# EAGLE board LTC4222 (EAGLE 9.6.2)
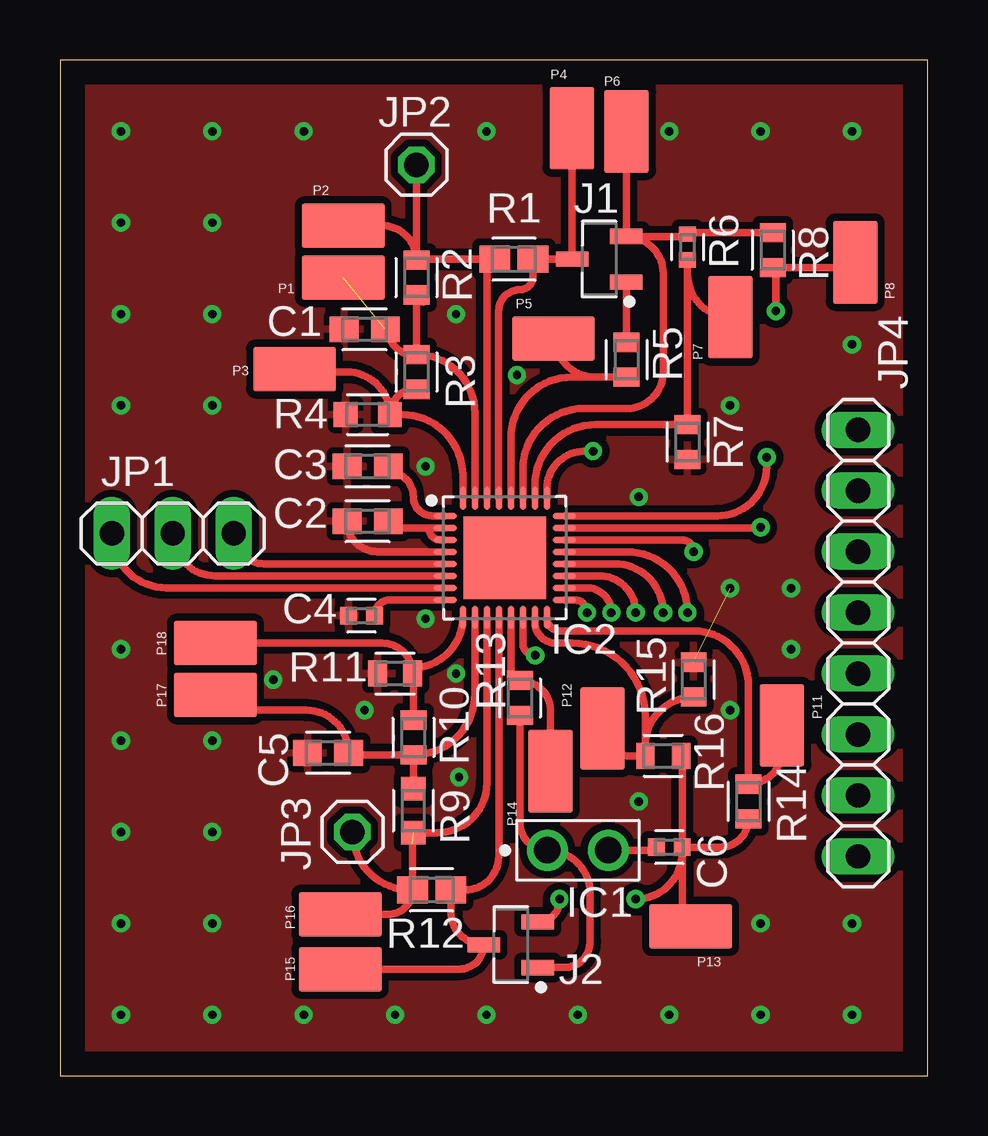
[diagram p0: board, top side]
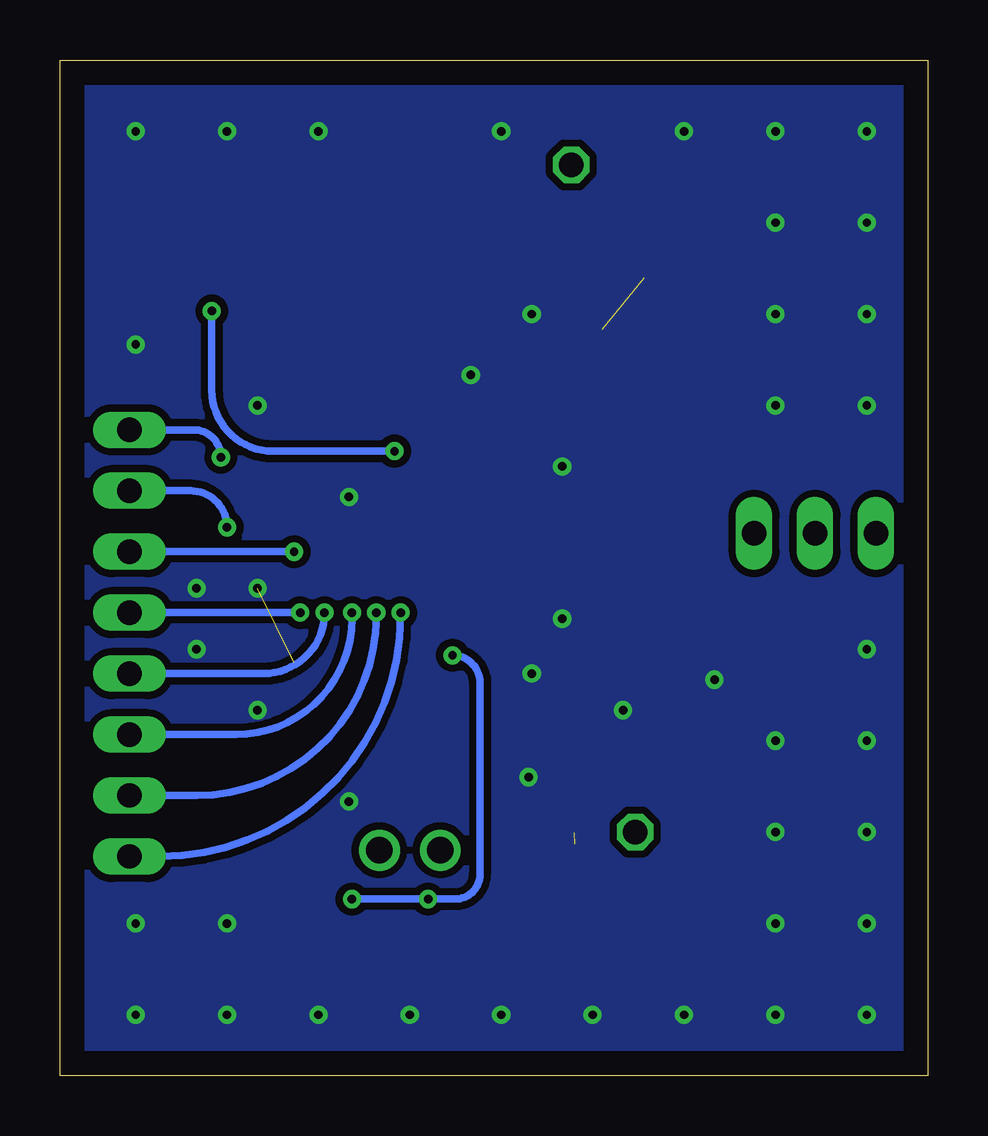
[diagram p1: board, bottom side, seen from below]

Size 36.17 x 42.34 mm. Coordinates in mm from the lower left corner, seen from the top.
Outline: 0,0 36.17,0 36.17,42.34 0,42.34 0,0
Copper layers (1*16): Top 0.035mm / dielectric 1.5mm / Bottom 0.035mm
Design rules "default": minimum track width 6mil, minimum drill 0.35mm, track to track 6mil, track to pad 6mil, pad to pad 6mil, via to via 6mil, smd to smd 6mil, copper to edge 40mil, drill to drill 6mil, minimum pad ring 10mil, minimum via ring 8mil, stop-mask expansion 4mil, vias tented up to drill 0mil, thermal gap 10mil

## Footprints (pad centres in the part's own frame; a part is rotated, then mirrored left to right if it is on the bottom)
CAPC1608X80M = smd 1.2 x 1.074: 1 -0.86,0; 2 0.86,0
CAPC1005X50M = smd 0.699 x 0.737: 1 -0.54,0; 2 0.54,0
HDRV2W64P254_2X1_241X508X838B = drill 1.105 pad 1.705: 1 0,0; 2 0,-2.54
QFN50P500X500X75-33T345M = smd 0.96 x 0.27: 1 -2.485,1.75; 2 -2.485,1.25; 3 -2.485,0.75; 4 -2.485,0.25; 5 -2.485,-0.25; 6 -2.485,-0.75; 7 -2.485,-1.25; 8 -2.485,-1.75; 17 2.485,-1.75; 18 2.485,-1.25; 19 2.485,-0.75; 20 2.485,-0.25; 21 2.485,0.25; 22 2.485,0.75; 23 2.485,1.25; 24 2.485,1.75 | smd 0.27 x 0.96: 9 -1.75,-2.485; 10 -1.25,-2.485; 11 -0.75,-2.485; 12 -0.25,-2.485; 13 0.25,-2.485; 14 0.75,-2.485; 15 1.25,-2.485; 16 1.75,-2.485; 25 1.75,2.485; 26 1.25,2.485; 27 0.75,2.485; 28 0.25,2.485; 29 -0.25,2.485; 30 -0.75,2.485; 31 -1.25,2.485; 32 -1.75,2.485 | smd 3.45 x 3.45: 33 0,0
SOT95P230X110-3M = smd 1.359 x 0.63: 1 -1.128,0.95; 2 -1.128,-0.95; 3 1.128,0
1X03 = drill 1.016 long: 1 -2.54,0; 2 0,0; 3 2.54,0
1X01 = drill 1.016 octagon: 1 0,0
1X08 = drill 1.016 long: 1 -8.89,0; 2 -6.35,0; 3 -3.81,0; 4 -1.27,0; 5 1.27,0; 6 3.81,0; 7 6.35,0; 8 8.89,0
S1751-46R = smd 3.45 x 1.85: 1 0,0
RESC1507X40M = smd 1.286 x 1.126: 1 -0.798,0; 2 0.798,0
AT0603 = smd 0.799 x 1.079: 1 -0.726,0; 2 0.726,0
RESC1608X45M = smd 0.988 x 1.029: 1 -0.92,0; 2 0.92,0
RESC1005X35M = smd 0.635 x 0.7: 1 -0.532,0; 2 0.532,0
RESC1508X47M = smd 0.757 x 1.079: 1 -0.746,0; 2 0.746,0

## Placement (x,y rotation side)
C1  CGA3E2X7R1H104K080AE  [CAPC1608X80M]  12.7,31.11 0 top
C2  CGA3E2X7R1H104K080AE  [CAPC1608X80M]  12.83,23.11 0 top
C3  CGA3E1X7R1V105K080AE  [CAPC1608X80M]  12.83,25.4 0 top
C4  CGA2B3X7R1E683K050BB  [CAPC1005X50M]  12.57,19.18 0 top
C5  CGA3E2X7R1H104K080AE  [CAPC1608X80M]  11.18,13.46 0 top
C6  CGA2B3X7R1V223K050BB  [CAPC1005X50M]  25.4,9.53 0 top
IC1  67997-100HLF  [HDRV2W64P254_2X1_241X508X838B]  20.32,9.4 90 top
IC2  LTC4222  [QFN50P500X500X75-33T345M]  18.54,21.59 0 top
J1  PMV15ENEAR  [SOT95P230X110-3M]  22.48,34.04 180 top
J2  PMV15ENEAR  [SOT95P230X110-3M]  18.8,5.46 180 top
JP1  [1X03]  4.7,22.61 0 top
JP2  [1X01]  14.86,37.97 0 top
JP3  [1X01]  12.19,10.16 0 top
JP4  [1X08]  33.27,18.03 270 top
P1  S1751-46R  [S1751-46R]  11.81,33.27 180 top
P2  S1751-46R  [S1751-46R]  11.81,35.43 0 top
P3  S1751-46R  [S1751-46R]  9.78,29.46 180 top
P4  S1751-46R  [S1751-46R]  21.34,39.5 270 top
P5  S1751-46R  [S1751-46R]  20.57,30.73 180 top
P6  S1751-46R  [S1751-46R]  23.62,39.37 90 top
P7  S1751-46R  [S1751-46R]  27.94,31.62 270 top
P8  S1751-46R  [S1751-46R]  33.15,33.91 90 top
P11  S1751-46R  [S1751-46R]  30.1,14.61 270 top
P12  S1751-46R  [S1751-46R]  22.61,14.48 90 top
P13  S1751-46R  [S1751-46R]  26.29,6.22 180 top
P14  S1751-46R  [S1751-46R]  20.45,12.7 90 top
P15  S1751-46R  [S1751-46R]  11.68,4.45 180 top
P16  S1751-46R  [S1751-46R]  11.68,6.73 180 top
P17  S1751-46R  [S1751-46R]  6.48,15.88 0 top
P18  S1751-46R  [S1751-46R]  6.48,18.03 0 top
R1  WSL0603R0180FEA  [RESC1507X40M]  18.92,34.04 0 top
R2  TNPW060334K0BEEA  [AT0603]  14.86,33.27 90 top
R3  TNPW06031K02BEEA  [AT0603]  14.86,29.34 90 top
R4  AT0603DRD073K4L  [RESC1608X45M]  12.83,27.56 180 top
R5  TNPW060310R0BEEN  [AT0603]  23.62,29.84 90 top
R6  TNPW040210K2BEED  [RESC1005X35M]  26.16,34.54 90 top
R7  TNPW06033K57BEEA  [AT0603]  26.16,26.42 90 top
R8  TNPW060310K0BEEN  [AT0603]  29.72,34.42 90 top
R9  AT0603DRD071K82L  [RESC1608X45M]  14.73,11.05 90 top
R10  TNPW0603392RBEEA  [AT0603]  14.73,14.1 90 top
R11  TNPW0603953RBEEA  [AT0603]  13.97,16.76 180 top
R12  WSL0603R0180FEA  [RESC1507X40M]  15.49,7.75 0 top
R13  TNPW060310R0BEEN  [AT0603]  19.18,15.75 90 top
R14  TNPW060310K0BEEN  [AT0603]  28.7,11.43 90 top
R15  TNPW06033K57BEEA  [AT0603]  26.42,16.51 90 top
R16  MCT0603PD4991DP500  [RESC1508X47M]  25.15,13.34 180 top

## Library data of the parts
C1 C2 C5 = Baja_Parts_Lib; DESCRIPTION: Multilayer Ceramic Capacitors MLCC - SMD/SMT SOFT 0603 50V 0.1uF X7R 10% AEC-Q200; HEIGHT: 0.8 mm; MANUFACTURER_NAME: TDK; MANUFACTURER_PART_NUMBER: CGA3E2X7R1H104K080AE; MOUSER_PART_NUMBER: 810-CGA3E2X7R1H104KE; MOUSER_PRICE-STOCK: https://www.mouser.com/ProductDetail/TDK/CGA3E2X7R1H104K080AE?qs=n%2FVzw7c4a0kvajqFvEbDzQ%3D%3D
C3 = Baja_Parts_Lib; DESCRIPTION: Multilayer Ceramic Capacitors MLCC - SMD/SMT SOFT 0603 35V 1uF X7R 10% AEC-Q200; HEIGHT: 0.8 mm; MANUFACTURER_NAME: TDK; MANUFACTURER_PART_NUMBER: CGA3E1X7R1V105K080AE; MOUSER_PART_NUMBER: 810-CGA3E1X7R1V105KA; MOUSER_PRICE-STOCK: https://www.mouser.com/ProductDetail/TDK/CGA3E1X7R1V105K080AE?qs=nQSIdc08i%252BfiPojSMYifNA%3D%3D
C4 = Baja_Parts_Lib; DESCRIPTION: Multilayer Ceramic Capacitors MLCC - SMD/SMT CGA 0402 25V 0.068uF X7R 10% AEC-Q200; HEIGHT: 0.5 mm; MANUFACTURER_NAME: TDK; MANUFACTURER_PART_NUMBER: CGA2B3X7R1E683K050BB; MOUSER_PART_NUMBER: 810-CGA2B3X7R1E683KB; MOUSER_PRICE-STOCK: https://www.mouser.com/ProductDetail/TDK/CGA2B3X7R1E683K050BB?qs=xLDY6iXSiQadJRj3xSTsHw%3D%3D
C6 = Baja_Parts_Lib; DESCRIPTION: Multilayer Ceramic Capacitors MLCC - SMD/SMT CGA 0402 35V 0.022uF X7R 10% AEC-Q200; HEIGHT: 0.5 mm; MANUFACTURER_NAME: TDK; MANUFACTURER_PART_NUMBER: CGA2B3X7R1V223K050BB; MOUSER_PART_NUMBER: 810-CGA2B3X7R1V223KB; MOUSER_PRICE-STOCK: https://www.mouser.com/ProductDetail/TDK/CGA2B3X7R1V223K050BB?qs=xLDY6iXSiQZvE13Mgd36Mg%3D%3D
IC1 = Baja_Parts_Lib; DESCRIPTION: Headers & Wire Housings .100CC STR HEADER; HEIGHT: 31.04 mm; MANUFACTURER_NAME: Amphenol FCi; MANUFACTURE_PART_NUMBER: 67997-100HLF; MOUSER_PART_NUMBER: 649-67997-100HLF; MOUSER_PRICE-STOCK: https://www.mouser.com/ProductDetail/Amphenol-FCI/67997-100HLF?qs=cpLrBgdhsoH33Mp6xh%2FbyQ%3D%3D
IC2 = Baja_Parts_Lib; DESCRIPTION: Hot Swap Voltage Controllers Dual Hot Swap Controller w/ADC and I2C; HEIGHT: 0.75 mm; MANUFACTURER_NAME: Analog Devices; MANUFACTURER_PART_NUMBER: LTC4222CUH#PBF; MOUSER_PART_NUMBER: 584-LTC4222CUH#PBF; MOUSER_PRICE-STOCK: https://www.mouser.com/ProductDetail/Analog-Devices/LTC4222CUHPBF?qs=sGAEpiMZZMsKEdP9slC0YZc6cH0Tuf0NcujsStLpH6A%3D
J1 J2 = Baja_Parts_Lib; DESCRIPTION: MOSFET 30V N-CHANNEL; HEIGHT: 1 mm; MANUFACTURER_NAME: Nexperia; MANUFACTURER_PART_NUMBER: PMV15ENEAR; MOUSER_PART_NUMBER: 771-PMV15ENEAR; MOUSER_PRICE-STOCK: https://www.mouser.com/ProductDetail/Nexperia/PMV15ENEAR?qs=T3oQrply3y80fkWq77yzJw%3D%3D
JP1-JP4 = pinhead
P1-P8 P11-P18 = Baja_Parts_Lib
R1 R12 = Baja_Parts_Lib; DESCRIPTION: Current Sense Resistors - SMD 1/10watt .018ohms 1%; HEIGHT: 0.33 mm; MANUFACTURER_NAME: Vishay/Dale; MANUFACTURER_PART_NUMBER: WSL0603R0180FEA; MOUSER_PART_NUMBER: 71-WSL0603R0180FEA; MOUSER_PRICE-STOCK: https://www.mouser.com/ProductDetail/Vishay-Dale/WSL0603R0180FEA?qs=WgxguIJepIVxM5lrrv8PKQ%3D%3D
R2 = Baja_Parts_Lib; DESCRIPTION: Thin Film Resistors - SMD 34Kohms .1% 25ppm; HEIGHT: 0.45 mm; MANUFACTURER_NAME: Vishay/Dale; MANUFACTURER_PART_NUMBER: TNPW060334K0BEEA; MOUSER_PART_NUMBER: 71-TNPW060334K0BEEA; MOUSER_PRICE-STOCK: https://www.mouser.com/ProductDetail/Vishay-Dale/TNPW060334K0BEEA?qs=kHCK1FE53PlE3u8PggA5Ww%3D%3D
R3 = Baja_Parts_Lib; DESCRIPTION: Thin Film Resistors - SMD 1.02Kohms .1% 25ppm; HEIGHT: 0.45 mm; MANUFACTURER_NAME: Vishay/Dale; MANUFACTURER_PART_NUMBER: TNPW06031K02BEEA; MOUSER_PART_NUMBER: 71-TNPW06031K02BEEA; MOUSER_PRICE-STOCK: https://www.mouser.com/ProductDetail/Vishay-Dale/TNPW06031K02BEEA?qs=U8jWr0D8IJjr1FstIpZwmw%3D%3D
R4 = Baja_Parts_Lib; DESCRIPTION: Thin Film Resistors - SMD 3.4 Kohms 0.5% Tol. AEC-Q200; HEIGHT: 0.45 mm; MANUFACTURER_PART_NUMBER: AT0603DRD073K4L; MANUFACTURE_NAME: YAGEO; MOUSER_PART_NUMBER: 603-AT0603DRD073K4L; MOUSER_PRICE-STOCK: https://www.mouser.com/ProductDetail/YAGEO/AT0603DRD073K4L?qs=tggtontpCXPtTFYMCVhXyg%3D%3D
R5 R13 = Baja_Parts_Lib; DESCRIPTION: Thin Film Resistors - SMD 10ohms .1% 25ppm; HEIGHT: 0.45 mm; MANUFACTURER_NAME: Vishay/Dale; MANUFACTURER_PART_NUMBER: TNPW060310R0BEEN; MOUSER_PART_NUMBER: 71-TNPW060310R0BEEN; MOUSER_PRICE-STOCK: https://www.mouser.com/ProductDetail/Vishay-Dale/TNPW060310R0BEEN?qs=sGAEpiMZZMtlubZbdhIBINBUesVvBWI8Ir7KK%252BezhzA%3D
R6 = Baja_Parts_Lib; DESCRIPTION: Thin Film Resistors - SMD 10.2Kohms .1% 25ppm; HEIGHT: 0.35 mm; MANUFACTURER_NAME: Vishay/Dale; MANUFACTURER_PART_NUMBER: TNPW040210K2BEED; MOUSER_PART_NUMBER: 71-TNPW040210K2BEED; MOUSER_PRICE-STOCK: https://www.mouser.com/ProductDetail/Vishay-Dale/TNPW040210K2BEED?qs=sGAEpiMZZMtlubZbdhIBIPq2G7T3A9VRhqKxiHUGEIk%3D
R7 R15 = Baja_Parts_Lib; DESCRIPTION: Thin Film Resistors - SMD 3.57kohms .1% 25ppm; HEIGHT: 0.45 mm; MANUFACTURER_NAME: Vishay/Dale; MANUFACTURER_PART_NUMBER: TNPW06033K57BEEA; MOUSER_PART_NUMBER: 71-TNPW06033K57BEEA; MOUSER_PRICE-STOCK: https://www.mouser.com/ProductDetail/Vishay-Dale/TNPW06033K57BEEA?qs=kHCK1FE53Pku%252BV6IyV8rEg%3D%3D
R8 R14 = Baja_Parts_Lib; DESCRIPTION: Thin Film Resistors - SMD 10Kohms .1% 25ppm; HEIGHT: 0.45 mm; MANUFACTURER_NAME: Vishay/Dale; MANUFACTURER_PART_NUMBER: TNPW060310K0BEEN; MOUSER_PART_NUMBER: 71-TNPW060310K0BEEN; MOUSER_PRICE-STOCK: https://www.mouser.com/ProductDetail/Vishay-Dale/TNPW060310K0BEEN?qs=ys0FHdAnsy4pY5DJwuessg%3D%3D
R9 = Baja_Parts_Lib; DESCRIPTION: Thin Film Resistors - SMD 1.82 Kohms 0.5% Tol. AEC-Q200; HEIGHT: 0.45 mm; MANUFACTURER_NAME: YAGEO; MANUFACTURER_PART_NUMBER: AT0603DRD071K82L; MOUSER_PART_NUMBER: 603-AT0603DRD071K82L; MOUSER_PRICE-STOCK: https://www.mouser.com/ProductDetail/Yageo/AT0603DRD071K82L?qs=tggtontpCXPbCWwxdLaIvQ%3D%3D
R10 = Baja_Parts_Lib; DESCRIPTION: Thin Film Resistors - SMD 392ohms .1% 25ppm; HEIGHT: 0.45 mm; MANUFACTURER_NAME: Vishay/Dale; MANUFACTURER_PART_NUMBER: TNPW0603392RBEEA; MOUSER_PART_NUMBER: 71-TNPW0603392RBEEA; MOUSER_PRICE-STOCK: https://www.mouser.com/ProductDetail/Vishay-Dale/TNPW0603392RBEEA?qs=kHCK1FE53PkNbYaq0EU6Lw%3D%3D
R11 = Baja_Parts_Lib; DESCRIPTION: Thin Film Resistors - SMD 953ohms .1% 25ppm; HEIGHT: 0.45 mm; MANUFACTURER_NAME: Vishay/Dale; MANUFACTURER_PART_NUMBER: TNPW0603953RBEEA; MOUSER_PART_NUMBER: 71-TNPW0603953RBEEA; MOUSER_PRICE-STOCK: https://www.mouser.com/ProductDetail/Vishay-Dale/TNPW0603953RBEEA?qs=CqEPuS5aiX8a1bzjUmak3Q%3D%3D
R16 = Baja_Parts_Lib; DESCRIPTION: Thin Film Resistors - SMD .250W 4.99Kohms .5% 0603 25ppm Hi Power; HEIGHT: 0.45 mm; MANUFACTURER_NAME: Vishay/Beyschlag; MANUFACTURER_PART_NUMBER: MCT0603PD4991DP500; MOUSER_PART_NUMBER: 594-MCT0603PD4991DP5; MOUSER_PRICE-STOCK: https://www.mouser.com/ProductDetail/Vishay-Beyschlag/MCT0603PD4991DP500?qs=5aG0NVq1C4xQ68f1sPHBvQ%3D%3D

## Nets
ADIN1: IC2.23 JP4.2
ADIN2: IC2.18 JP4.7
ALERT: IC2.21 JP4.4
GND: C1.1 C2.1 C3.1 C4.1 C5.1 IC2.4 R4.2 R7.1 R11.2 R15.2
N$1: J1.1 R5.2
N$2: IC2.30 JP2.1 P2.1 R1.1 R2.2
N$3: IC2.24 JP4.1
N$4: IC2.20 JP4.5
N$5: IC2.19 JP4.6
N$6: IC2.29 J1.3 P4.1 R1.2
N$7: IC2.32 P3.1 R3.1 R4.1
N$8: C1.2 IC2.31 P1.1 R2.1 R3.2
N$9: IC2.17 JP4.8
N$10: C2.2 IC2.2 IC2.3
N$11: IC2.28 P5.1 R5.1
N$12: IC2.27 J1.2 P6.1 R6.2 R8.2
N$13: IC2.7 JP1.1
N$14: IC2.25 P8.1 R8.1
N$15: C4.2 IC2.8
N$16: C3.2 IC2.1
N$18: IC2.13 P14.1 R13.2
N$19: IC2.9 P18.1 R10.2 R11.1
N$20: IC2.12 J2.3 P15.1 R12.2
N$21: IC2.11 JP3.1 P16.1 R9.1 R12.1
N$22: IC1.1 J2.1 R13.1
N$23: C6.2 IC2.14 J2.2 P13.1 R14.1 R16.1
N$24: C6.1 IC1.2
N$25: IC2.15 P12.1 R15.1 R16.2
N$26: IC2.16 P11.1 R14.2
N$27: C5.2 IC2.10 P17.1 R9.2 R10.1
N$29: IC2.26 P7.1 R6.1 R7.2
N$30: IC2.6 JP1.2
N$31: IC2.5 JP1.3
ON: IC2.22 JP4.3

## Tracks (layer width: path | path; a pad name or v marks a point on that pad's centre or on a via)
ADIN1  (via drill 0.35)
  Top 0.305: IC2.23 29.19,22.84 arc90 v29.21,22.86
  Bottom 0.305: v29.21,22.86 arc-90 30.73,24.38 JP4.2
ADIN2  (via drill 0.35)
  Top 0.305: IC2.18 21.95,20.34 arc-90 v22.99,19.3
  Bottom 0.305: JP4.7 30.48,11.68 arc-90 22.99,19.18 v22.99,19.3
ALERT  (via drill 0.35)
  Top 0.305: IC2.21 23.63,21.84 arc-90 v26.16,19.3
  Bottom 0.305: v26.16,19.3 JP4.4
GND  (via drill 0.35)  (1 unrouted)
  Top 0.305: IC2.4 13.24,21.84 arc-90 C2.1
  other vias: 2.54,39.37 24.13,24.13 27.94,20.32 30.48,20.32 30.48,17.78 27.94,15.24 24.13,11.43 16.51,16.76 33.02,6.35 29.21,6.35 33.02,2.54 29.21,2.54 25.4,2.54 21.59,2.54 17.78,2.54 13.97,2.54 10.16,2.54 6.35,2.54 2.54,2.54 2.54,6.35 6.35,6.35 6.35,10.16 2.54,10.16 2.54,13.97 6.35,13.97 8.89,16.51 12.7,15.24 15.24,19.05 16.64,12.45 2.54,17.78 2.54,27.94 6.35,27.94 2.54,35.56 2.54,31.75 6.35,31.75 6.35,35.56 6.35,39.37 10.16,39.37 15.24,25.4 16.51,31.75 17.78,39.37 19.05,29.21 27.94,27.94 33.02,30.48 25.4,39.37 29.21,39.37 33.02,39.37
  pour Top (isolate 0.305): -0.13,-0.13 36.32,-0.13 36.32,42.42 -0.13,42.42
  pour Bottom (isolate 0.305): -0.13,-0.13 36.32,-0.13 36.32,42.42 -0.13,42.42
N$1
  Top 0.305: R5.2 arc-90 23.61,30.59 J1.1
N$2
  Top 0.152: R2.2 14.71,34.15
  Top 0.305: 17.74,34.42 arc-90 R1.1 | R2.2 arc-90 14.9,34.04 R1.1 | R1.1 18.03,33.95 | R2.2 arc90 13.43,35.43 P2.1 | R2.2 JP2.1 | R1.1 arc90 17.79,33.7 IC2.30
N$3  (via drill 0.35)
  Top 0.305: IC2.24 27.4,23.34 arc90 29.46,25.4 v29.46,25.78
  Bottom 0.305: v29.46,25.78 arc-90 30.61,26.92 JP4.1
N$4  (via drill 0.35)
  Top 0.305: IC2.20 23.11,21.34 arc-90 v25.15,19.3
  Bottom 0.305: JP4.5 27.69,16.76 arc-90 v25.15,19.3
N$5  (via drill 0.35)
  Top 0.305: IC2.19 22.47,20.84 arc-90 v24,19.3
  Bottom 0.305: JP4.6 28.83,14.22 arc-90 24,19.05 v24,19.3
N$6
  Top 0.305: 19.18,32.77 arc90 19.72,33.31 R1.2 J1.3 21.35,39.48 arc90 P4.1 | 19.18,32.77 19.05,32.77 | 19.18,32.77 arc90 18.29,31.88 IC2.29 arc90 IC2.29
N$7
  Top 0.305: R4.1 13.75,27.53 | R4.1 arc-90 13.75,27.4 | 9.65,29.46 P3.1 9.91,29.34 11.97,29.34 arc-90 R4.1 | R3.1 14.8,28.61 arc90 R4.1 | R4.1 14.25,27.56 arc-90 16.79,25.02 IC2.32
N$8  (1 unrouted)
  Top 0.305: 14.86,30.32 arc90 R3.2 | R3.2 R2.1 arc90 15.15,32.26 | C1.2 13.68,31.11 arc90 14.73,30.06 R3.2 | IC2.31 17.29,27.63 arc90 R3.2
N$9  (via drill 0.35)
  Top 0.305: IC2.17 21.43,19.84 arc-90 v21.97,19.3
  Bottom 0.305: JP4.8 32,9.14 arc-90 21.97,19.18 v21.97,19.3
N$10
  Top 0.305: IC2.2 15.37,22.84 | 15.37,22.84 13.96,22.84 arc90 C2.2 | IC2.3 15.87,22.34 arc-90 15.37,22.84
N$11
  Top 0.152: 20.64,30.8 P5.1
  Top 0.305: IC2.28 18.79,26.58 arc-90 21.33,29.12 R5.1 22.32,29.12 arc-90 20.64,30.8
N$12
  Top 0.305: R8.2 29.72,35.27 | R8.2 29.72,35.18 | J1.2 23.61,39.35 arc-90 P6.1 | J1.2 26.07,34.99 arc-90 R6.2 arc-90 26.23,35.14 R8.2 | IC2.27 19.29,25.27 arc-90 21.83,27.81 23.62,27.81 arc90 25.15,29.34 25.15,33.45 arc90 J1.2
N$13
  Top 0.152: IC2.7 arc-45 16.01,20.32
  Top 0.305: IC2.7 4.42,20.34 arc-90 JP1.1
N$14  (via drill 0.35)
  Top 0.305: IC2.25 20.29,24.46 arc-90 21.87,26.04 v22.23,26.04 | 33.36,34.13 P8.1 arc-90 32.93,33.69 R8.1 arc-90 29.84,33.56 v29.84,31.88
  Bottom 0.305: v29.84,31.88 29.84,28.57 arc-90 27.3,26.04 v22.23,26.04
N$15
  Top 0.152: C4.2 13.13,19.16
  Top 0.305: IC2.8 15.24,19.84 14.89,19.84 13.78,19.84 arc90 C4.2
N$16
  Top 0.305: 15.88,23.34 IC2.1 15.52,23.34 arc-90 14.73,24.13 arc90 13.69,25.18 C3.2
N$18
  Top 0.152: 20.32,12.83 P14.1 20.45,11.68
  Top 0.305: IC2.13 18.79,16.86 arc90 R13.2 arc-90 20.45,15.2 20.45,11.68
N$19
  Top 0.305: 14.86,16.76 R11.1 | R11.1 arc90 13.43,18.03 P18.1 | R11.1 arc-90 14.73,16.73 R10.2 | IC2.9 arc-90 14.7,17.01 R11.1
N$20
  Top 0.305: IC2.12 18.29,9.15 arc-90 16.89,7.75 R12.2 16.29,6.84 arc90 J2.3 arc-90 16.65,4.45 P15.1
N$21  (1 unrouted)
  Top 0.152: R12.1 14.66,7.72
  Top 0.305: R12.1 14.7,9.66 | IC2.11 17.79,12.2 arc-90 15.72,10.13 R9.1 | JP3.1 arc90 14.61,7.75 R12.1 | R12.1 arc-90 13.68,6.73 P16.1
N$22
  Top 0.305: R13.1 19.18,10.54 arc90 IC1.1 arc-90 22.1,7.62 22.1,5.59 arc-90 21.02,4.51 J2.1
N$23  (via drill 0.35)
  Top 0.305: 26.29,6.36 P13.1 arc-90 25.94,6.57 C6.2 | IC2.14 19.29,18.05 arc90 v19.81,17.53 | C6.2 25.94,13.29 arc90 R16.1 | C6.2 25.94,9.3 arc-90 v24,7.37 | J2.2 arc90 20.83,7.32 v20.83,7.37 | C6.2 27.52,9.53 arc90 R14.1
  Bottom 0.305: v19.81,17.53 arc90 18.67,16.38 18.67,8.38 arc90 19.68,7.37 v20.83,7.37 v24,7.37
N$24
  Top 0.305: C6.1 24.73,9.4 IC1.2
N$25
  Top 0.305: IC2.15 19.79,18.92 arc90 20.68,18.03 21.35,18.03 arc-90 24.4,14.99 R16.2 | R16.2 24.4,13.77 arc-90 R15.1 | 23.13,14.48 P12.1 arc90 23.75,13.34 R16.2
N$26
  Top 0.305: IC2.16 arc90 20.86,18.54 26.42,18.54 arc-90 28.7,16.26 R14.2 arc90 30.1,13.55 P11.1
N$27
  Top 0.305: R10.1 12.13,13.37 arc-90 C5.2 arc90 10.26,15.24 7.11,15.24 P17.1 | R10.1 14.75,13.37 arc90 17.29,15.91 IC2.10 | R9.2 R10.1
N$29
  Top 0.305: P7.1 arc-90 26.16,33.4 R6.1 R7.2 22.33,27.14 arc90 19.79,24.6 IC2.26
N$30
  Top 0.305: IC2.6 6.46,20.84 arc-90 JP1.2
N$31
  Top 0.305: JP1.3 arc90 8.51,21.34 IC2.5
ON  (via drill 0.35)
  Top 0.305: IC2.22 25.92,22.34 arc-90 v26.42,21.84
  Bottom 0.305: v26.42,21.84 JP4.3